# Altium PCB Source_Follower.PcbDoc
Units mil, origin at the board's own origin, x right, y up, seen from the top; angles counter-clockwise.
Board outline 2500 x 2600 mil, 2 copper layers (Top Layer, Bottom Layer), stack 61.417 mil thick; 33 components, 18 nets, 69 pads, 4 vias.
Unrouted connection lines stored in the file: 3.
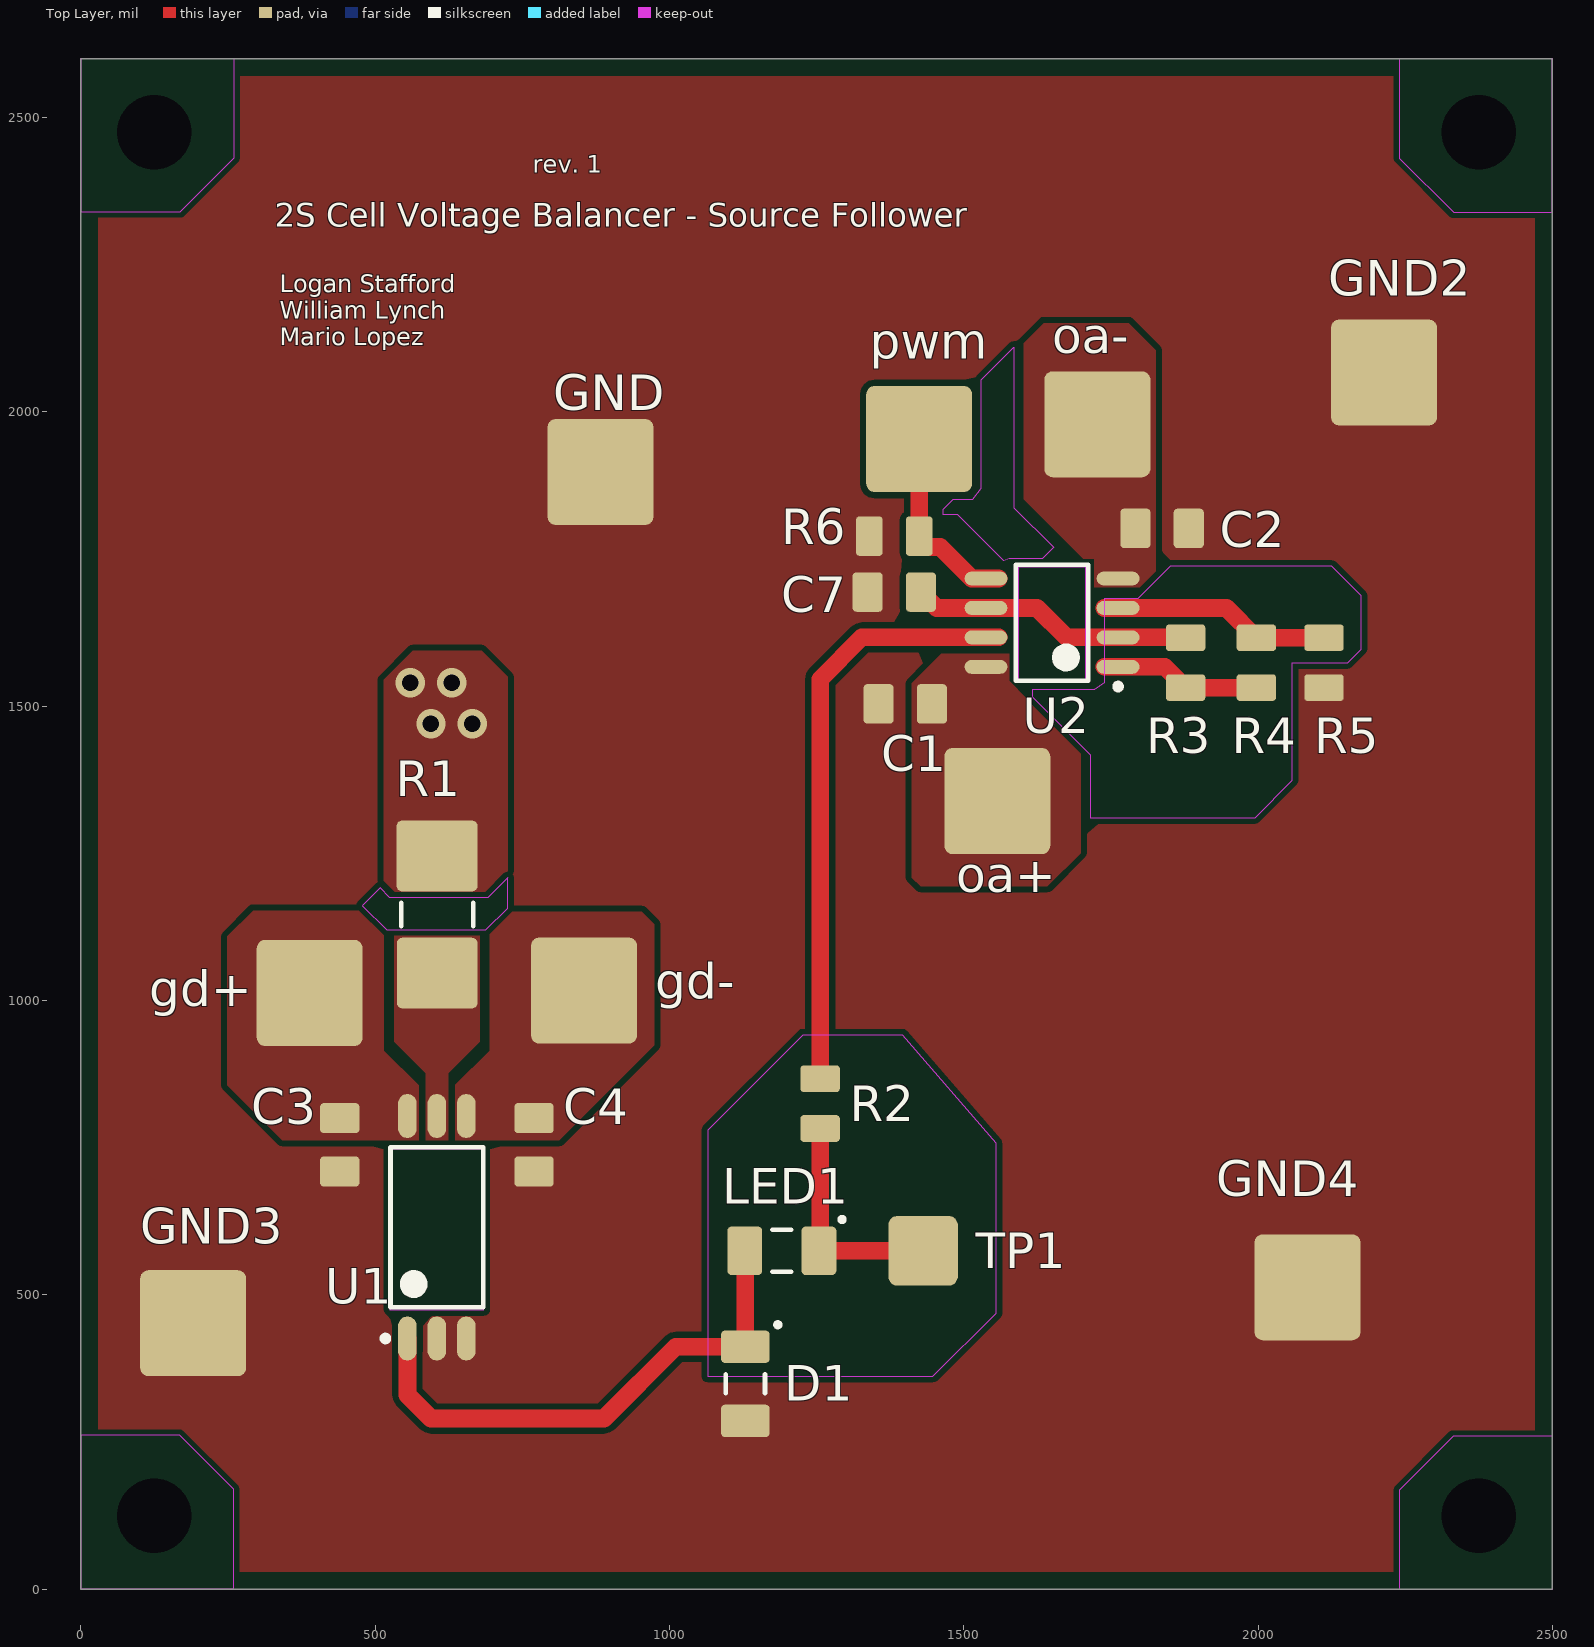
[diagram p0: Top Layer view]
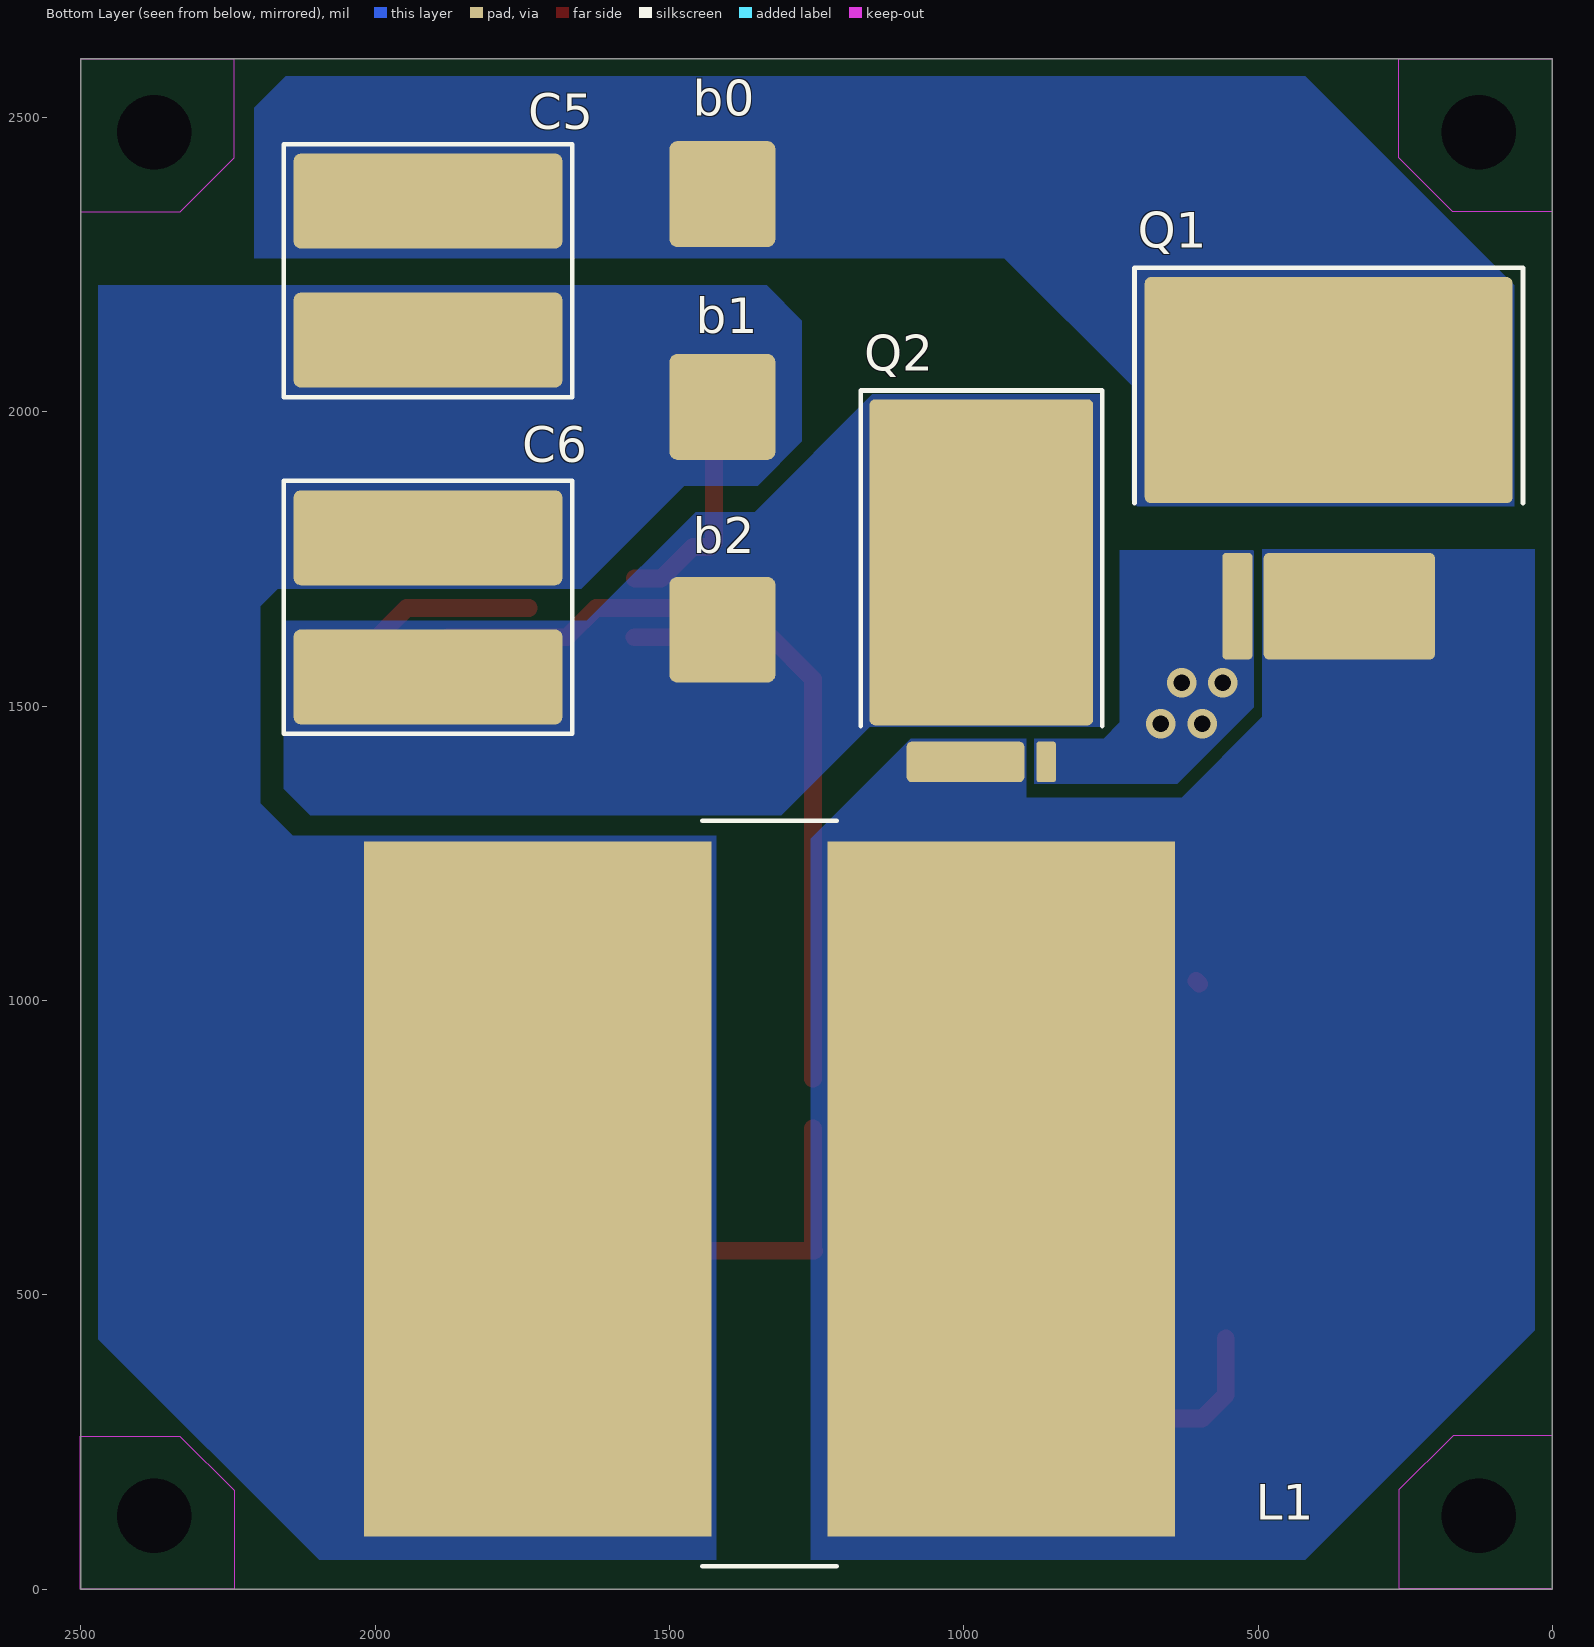
[diagram p1: Bottom Layer view, seen from below]

## Layer stack, top to bottom
Top Solder: solder mask 0.7874, Solder Resist, Dk 3.5
Top Layer: signal copper 2.7559
Dielectric 1: dielectric 55.9055, FR-4, Dk 4.8
Bottom Layer: signal copper 2.7559
Bottom Solder: solder mask 0.7874, Solder Resist, Dk 3.5

## Board outline
0,0 2500,0 2500,2600 0,2600

## Design rules (kind name [scope] priority, off if disabled: settings)
Clearance "Clearance~Sunstone Circuits" [All] p1: gap=10 ignorepadtopadclearanceinfootprint=FALSE // Sunstone Circuits Minimum Clearance Rule (Double Sided)
HoleSize "HoleSize~Sunstone Circuits" [All] p1: absolutevalues=TRUE maxlimit=251 minlimit=16 maxpercent=80.000 minpercent=20.000 // SSC Hole Size Rule For Single Sided & Double Sided Designs.
HoleSize Testpoint [All] p2: absolutevalues=TRUE maxlimit=100 minlimit=1 maxpercent=80.000 minpercent=20.000
HoleSize TestPointUsage [All] p3: absolutevalues=TRUE maxlimit=100 minlimit=1 maxpercent=80.000 minpercent=20.000
MinimumAnnularRing "MinimumAnnularRing~Sunstone Circuits" [All] p1: minimumring=7 // Sunstone Circuits Minimum Annular Ring (Double Sided)
PlaneClearance "PlaneClearance~Sunstone Circuits" [All] p1: clearance=30 // Sunstone Circuits Power Plane Clearance Rule (Double Sided)
PlaneConnect "PlaneConnect~Sunstone Circuits" [All] p1: planeconnectstyle=Direct reliefexpansion=10 reliefentries=4 reliefconductorwidth=8 reliefairgap=10 // Sunstone Circuits Power Plane Connect Rule (Double Sided)
PolygonConnect "PolygonConnect~Sunstone Circuits" [All] p1: connectstyle=Direct reliefconductorwidth=8 reliefentries=4 polygonreliefangle="90 Angle" airgapwidth=10 // Sunstone Circuits Polygon Connect Style (Double Sided)
RoutingVias "RoutingVias~Sunstone Circuits" [All] p1: holewidth=16 width=30 viastyle="Through Hole" minholewidth=16 minwidth=30 maxholewidth=20 maxwidth=40 // Sunstone Circuits Routing Vias Rule (Double Sided)
ShortCircuit "ShortCircuit~Sunstone Circuits" [All] p1: allowed=FALSE // Sunstone Circuits Short Circuit Rule~Do Not Allow (Double Sided)
SolderMaskExpansion "SolderMaskExpansion~Sunstone Circuits" [All] p1: expansion=3 istentingtop=FALSE // Sunstone Circuits Solder Mask Expansion Rule (Double Sided)
ViasUnderSMD "ViasUnderSMD~Sunstone Circuits" [All] p1: allowed=FALSE // Sunstone Circuits Vias Under SMD~Do Not Allow (Double Sided)
Width "Width~Sunstone Circuits" [All] p1: maxlimit=100 minlimit=6 preferedwidth=10 // Sunstone Circuits Minimum Width Rule (Double Sided)
26 further rules are at their usual default settings.

## Components (designator, comment, footprint, x,y, rotation, side; value= is the part's Value field where it differs from the comment)
b0 "Connector" connector_large 1410,2370 r180 bottom
b1 "Connector" connector_large 1410,2008.6 r180 bottom
b2 "Connector" connector_large 1410,1630 r180 bottom
C1 "C_0805" CAPC2012X14N 1400.54,1504 r180 top
C2 "C_0805" CAPC2012X14N 1837,1802.25 r180 top
C3 "C_0805" CAPC2012X14N 440,755 r270 top
C4 "C_0805" CAPC2012X14N 770,755 r90 top
C5 "cap" cap_by 1910,2240 r90 bottom
C6 "cap" cap_by 1910,1668.11 r90 bottom
C7 "C_0805" CAPC2012X14N 1382,1694 r180 top
D1 "TS4148 RXG" DIOC3215X08N 1129,349 r270 top
gd+ "Connector" connector_large 389,1013 r0 top
gd- "Connector" connector_large 855,1017 r0 top
GND "Connector" connector_large 883,1898 r0 top
GND2 "Connector" connector_large 2214,2067 r0 top
GND3 "Connector" connector_large 191,452 r0 top
GND4 "Connector" connector_large 2084,513 r0 top
L1 "General Inductor" Inductor_v1 1330,680 r0 bottom
LED1 "XZMDKVG55W-7" DIOC3216X18N 1191,575 r180 top
oa+ "Connector" connector_large 1557,1339 r90 top
oa- "Connector" connector_large 1727,1979 r90 top
pwm "Connector" connector_large 1424.32,1954 r180 top
Q1 "PMOS" PMOS 380,2030 r180 bottom
Q2 "NMOS" NMOS 970,1581.5 r180 bottom
R1 "R_1206/2512" RESC6331X06N 605.5,1146.25 r90 top
R2 "R_0805" RESC2012X06N 1256,825 r270 top
R3 "R_0805" RESC2012X06N 1877,1574 r90 top
R4 "R_0805" RESC2012X06N 1997,1574 r90 top
R5 "R_0805" RESC2012X06N 2112,1574 r90 top
R6 "R_0805" RESC2012X06N 1382,1789 r0 top
TP1 "Testpoint" testpoint 1431,575 r90 top
U1 "TLP5774" SOIC127P1000X220-6N 605,615 r90 top
U2 "OPA2197" SOIC127P600X175-8N 1650,1642 r180 top

## Footprints (in the part's own frame and the unit in brackets; to place one, negate y for a bottom-side part, rotate by r counter-clockwise, add the part's x,y. Pads: shape width x height; smd on the part's side, far side on the other; paste and mask are expansions set on the pad)
cap_by [mm]
  rrect15% 4.1x11.6 smd: 1(-3,0) 2(3,0)
  silkscreen extent -5.46,-6.22 5.46,6.22, body extent -3.97,-5.46 3.97,5.39, height 3
CAPC2012X14N [mm] "Chip Capacitor, 2-Leads, Body 2.00x1.25mm, IPC Medium Density"
  rrect25% 1.3x1.7 smd: 1(-1.15,0) 2(1.15,0)
  body extent -1.1,-0.72 1.1,0.72, height 1.45
connector_large [mil]
  rrect15% 180x180 smd: 1(0,0)
DIOC3215X08N [mm] "Chip Diode, 2-Leads, Body 3.20x1.50mm, IPC Medium Density"
  rrect25% 1.4x2.1 smd: 1(-1.6,0) 2(1.6,0)
  silkscreen extent -2.65,-0.85 0.4,1.5, body extent -1.7,-0.85 1.7,0.85, height 0.85
DIOC3216X18N [mm] "Chip Diode, 2-Leads, Body 3.20x1.60mm, IPC Medium Density"
  rrect25% 1.5x2.1 smd: 1(-1.6,0) 2(1.6,0)
  silkscreen extent -2.7,-1.45 0.4,0.9, body extent -1.6,-0.8 1.6,0.8, height 1.8
Inductor_v1 [mm]
  rect 15x30 smd: 1(-10,0) 2(10,0)
  silkscreen extent -2.9,-15.9 2.9,16.28, body extent -22.5,-15.62 22.5,16.26, height 22
NMOS [mil]
  rrect5% 380x554 smd: D(0,163)
  rrect25% 33x69 smd: G(110,-176)
  rrect25% 200x69 smd: S(-27,-176)
  silkscreen extent -205,-115 205,455, body extent -60,-170 130,71, height 39
PMOS [mil]
  rrect5% 625x384 smd: D(0,7)
  rrect25% 51x181 smd: G(-155,-360)
  rrect10% 291x181 smd: S(35,-360)
  silkscreen extent -330,-185 330,215, body extent -198,-375 68,15, height 94
RESC2012X06N [mm] "Chip Resistor, 2-Leads, Body 2.00x1.25mm, IPC Medium Density"
  rrect25% 1.15x1.7 smd: 1(-1.075,0) 2(1.075,0)
  body extent -1.07,-0.7 1.07,0.7, height 0.65
RESC6331X06N [mm] "Chip Resistor, 2-Leads, Body 6.30x3.10mm, IPC Medium Density"
  rrect15% 3.048x3.48 smd: 1(-2.525,0)
  rrect15% 3.05x3.5 smd: 2(2.525,0)
  silkscreen extent -0.5,-1.55 0.5,1.55, body extent -3.22,-1.63 3.22,1.63, height 0.65
SOIC127P600X175-8N [mm] "SOIC, 8-Leads, Body 4.91x3.90mm, Pitch 1.27mm, IPC Medium Density"
  oval 1.85x0.6 smd: 1(-2.85,1.905) 2(-2.85,0.635) 3(-2.85,-0.635) 4(-2.85,-1.905) 5(2.85,-1.905) 6(2.85,-0.635) 7(2.85,0.635) 8(2.85,1.905)
  silkscreen extent -2.98,-2.5 1.57,2.88, body extent -3,-2.5 3,2.5, height 1.75
SOIC127P1000X220-6N [mm] "SOIC, 6-Leads, Body 3.84x7.50mm, Pitch 1.27mm, IPC Medium Density"
  oval 1.9x0.8 smd: 1(-4.8,1.27) 2(-4.8,0) 3(-4.8,-1.27) 4(4.8,-1.27) 5(4.8,0) 6(4.8,1.27)
  silkscreen extent -4.92,-2 3.45,2.34, body extent -5,-2 5,2, height 2.2
testpoint [mm]
  rrect25% 3x3 smd: 1(0,0)

## Part data
L1: library part "General Inductor-Symbol-1", RoomCode=Power
LED1: "No Description Available", Manufacturer_Part_Number=XZMDKVG55W-4, Built_By=EMA_Matt, Copyright="Copyright (C) 2018 Accelerated Designs. All rights reserved", Datasheet=https://www.sunledusa.com/products/spec/XZMDKVG55W-4.pdf, RefDes=RefDes, RoomCode=LED, SourceLibrary=SunLED_2020-06-23, Type=DEV, Vendor=SunLED
b0 b1 b2: RoomCode=PowerConnectors
C3 C4 R1 U1: RoomCode=U1
C5 C6 Q1 Q2: RoomCode=Power
C7 R3 R4 R5 R6 U2: RoomCode=U2
D1 R2 TP1: RoomCode=LED

## Free pads (board coordinates)
  round 0 hole 126: 1(125,125) 1(125,2475) 1(2375,125) 1(2375,2475)

## Via types
v1: diameter 50, hole 28, Top Layer to Bottom Layer, tented both sides, 4 vias

## Nets (pads, with @x,y where several pads share a name; then routed paths per layer and width w, separated by ;. In a path a pad name is that pad's centre, name@x,y a point inside that pad or via, vN(x,y) a via of type N, cw(c..) or ccw(c..) an arc to the next point about the centre after c; other vN are vias at no path point)
b0: b0.1 C5.2 Q1.D
b1: b1.1 C5.1 C6.2 L1.2
b2: b2.1 C6.1 Q2.D
gates: Q1.G Q2.G R1.2
  other v1: 595,1470 665,1470 560,1540 630,1540
gd+: C3.1 gd+.1 U1.6
gd-: C4.2 gd-.1 U1.4
GND: C1.2 C2.1 C3.2 C4.1 C7.2 D1.2 GND2.1 GND3.1 GND4.1 GND.1 R5.1 R6.1 U1.2 U1.3
NetC7_1: C7.1 R3.2 U2.2 U2.6 | length 481.9
  Top Layer w30: C7.1 1454.28,1667 U2.6 1624.5,1667 1674.5,1617 U2.2 1876.32,1617 R3.2
NetD1_1: D1.1 LED1.2 U1.1 | length 900.5
  Top Layer w30: U1.1 555,330 595,290 889,290 1010.99,411.99 D1.1 1129,574.01 LED1.2
NetL1_1: L1.1 Q1.S Q2.S
NetLED1_1: LED1.1 R2.2 TP1.1 | length 385.5
  Top Layer w30: R2.2 1256,577.01 LED1.1 TP1.1
NetR1_1: R1.1 U1.5 | length 7.1
  Top Layer w30: R1.1@600,1028.78 R1.1@605,1033.78
NetR2_1: R2.1 U2.7 | length 1011.5
  Top Layer w30: R2.1 1256,1546 1327,1617 U2.7 U2.7@1559.39,1617
NetR3_1: R3.1 R4.1 U2.1 | length 272.6
  Top Layer w30: U2.1@1739,1567 U2.1 1841.68,1567 R3.1 R4.1
NetR4_2: R4.2 R5.2 U2.3 | length 394
  Top Layer w30: U2.3@1739,1667 U2.3 1946.32,1667 R4.2 R5.2
oa+: C1.1 oa+.1 U2.8
oa-: C2.2 oa-.1 U2.4
pwm: pwm.1 R6.2 U2.5 | length 335.8
  Top Layer w30: pwm.1 R6.2 1424.32,1778.17 1431.96,1770.54 1460.1,1770.54 1513.63,1717 U2.5 U2.5@1559,1717

## Polygon pours and split planes (outlines as drawn)
gates on Bottom Layer "GATES_L02_P015" (solid, pour order 15): 505,1765 507,1763 507,1498 637,1368 880,1368 880,1445 762.5,1445 735,1472.5 735,1765
b1 on Bottom Layer "B1_L02_P019" (solid, pour order 19): 1275,1950 1275,2155 1335,2215 2470,2215 2470,425 2095,50 1420,50 1420,1280 2140,1280 2195,1335 2195,1670 2165,1700 1650,1700 1475,1875 1350,1875
b2 on Bottom Layer "B2_L02_P017" (solid, pour order 17): 2155,1360 2110,1315 1310,1315 1160,1465 765,1465 765,2030 1155,2030 1355,1830 1455,1830 1640,1645 2155,1645
b0 on Bottom Layer "B0_L02_P016" (solid, pour order 16): 2205,2261 2205,2517 2152,2570 420,2570 65,2215 65,1840 705,1840 715,1850 715,2045 931,2261
NetL1_1 on Bottom Layer "NETL1_1_L02_P014" (solid, pour order 14): 1260,50 420,50 30,440 30,1767 493,1767 493,1482 630,1345 894,1345 894,1445 1090,1445 1260,1275
GND on Top Layer "GND_L01_P027" (solid, pour order 27): 30,30 30,2570 2470,2570 2470,30
gd- on Top Layer "GD-_L01_P024" (solid, pour order 24): 636,763 813,763 974,924 974,1130 953,1151 732.95,1151 694.97,1113.02 694.97,915.03 636,856.98
gates on Top Layer "GATES_L01_P026" (solid, pour order 26): 535.63,1182.67 687.67,1182.67 725,1220 725,1550 681,1594 564,1594 515,1545 515,1203.31
oa+ on Top Layer "OA+_L01_P020" (solid, pour order 20): 1698.67,1250.67 1642,1194 1427,1194 1412,1209 1412,1539 1462,1589 1577,1589 1577,1543 1698.67,1421.33
NetR1_1 on Top Layer "NETR1_1_L01_P025" (solid, pour order 25): 586,763 624.38,763 624.38,876.38 678,930 678,1113 533,1113 533,930 586,877
gd+ on Top Layer "GD+_L01_P022" (solid, pour order 22): 515,1114 476,1153 293,1153 249,1109 249,856 342,763 574,763 574,856 515,915
oa- on Top Layer "OA-_L01_P021" (solid, pour order 21): 1722,1702 1799,1702 1826,1729 1826,2105 1780,2151 1636,2151 1602,2117 1602,1852 1703.29,1750.71 1722,1750.71

## Keep-outs
Top Layer:
  region: 1707.63,1546.2 1707.63,1736.14 1593,1736.14 1593,1546.2
  rectangle: 525,475 685,747.71
  region: 1226.54,941.54 1065,780 1065,361.54 1447.67,361.54 1555,468.87 1555,758.08 1396,941.54
  region: 508.64,1191.36 478.64,1161.36 520,1120 687.95,1120 725,1157.05 725,1208.99 691.01,1175 525,1175
  region: 1567.63,1747.37 1490,1825 1465,1825 1465,1835 1482,1852 1515,1852 1530,1870 1530,2055 1585,2110 1585,1837.64 1652.64,1770 1633.36,1750.71 1577,1750.71
  region: 1722,1528 1700.79,1528 1616,1528 1616,1516.33 1715,1417.33 1715,1311 1995,1311 2058,1374 2058,1574 2152,1574 2175,1597 2175,1688 2125,1738 1850.68,1738 1795.68,1683 1739,1683 1739,1540
Keep-Out Layer:
  region: 2500,2600 2240,2600 2240,2431 2332,2339 2500,2339
  region: 0,2600 0,2340 169,2340 261,2432 261,2600
  region: 2500.5,0 2500.5,260 2331.5,260 2239.5,168 2239.5,0
  region: 0,0.5 260,0.5 260,169.5 168,261.5 0,261.5

## Silkscreen, mask and mechanical layers (free items; w line width, h text height)
Top Overlay:
  text "rev. 1" at 768,2406 h30
  text "2S Cell Voltage Balancer - Source Follower" at 330,2315 h40
  text "Logan Stafford / William Lynch / Mario Lopez" at 338,2113 h30
Board:
  the board outline again, w10